# Altium PCB esp32.PcbDoc (part 1 of 3)
Units mil, origin at the board's own origin, x right, y up, seen from the top; angles counter-clockwise.
Board outline 2755 x 1098 mil, 4 copper layers (L1, L2, L3, L4), stack 61.745 mil thick; 63 components, 73 nets, 303 pads, 170 vias.
Unrouted connection lines stored in the file: 4.
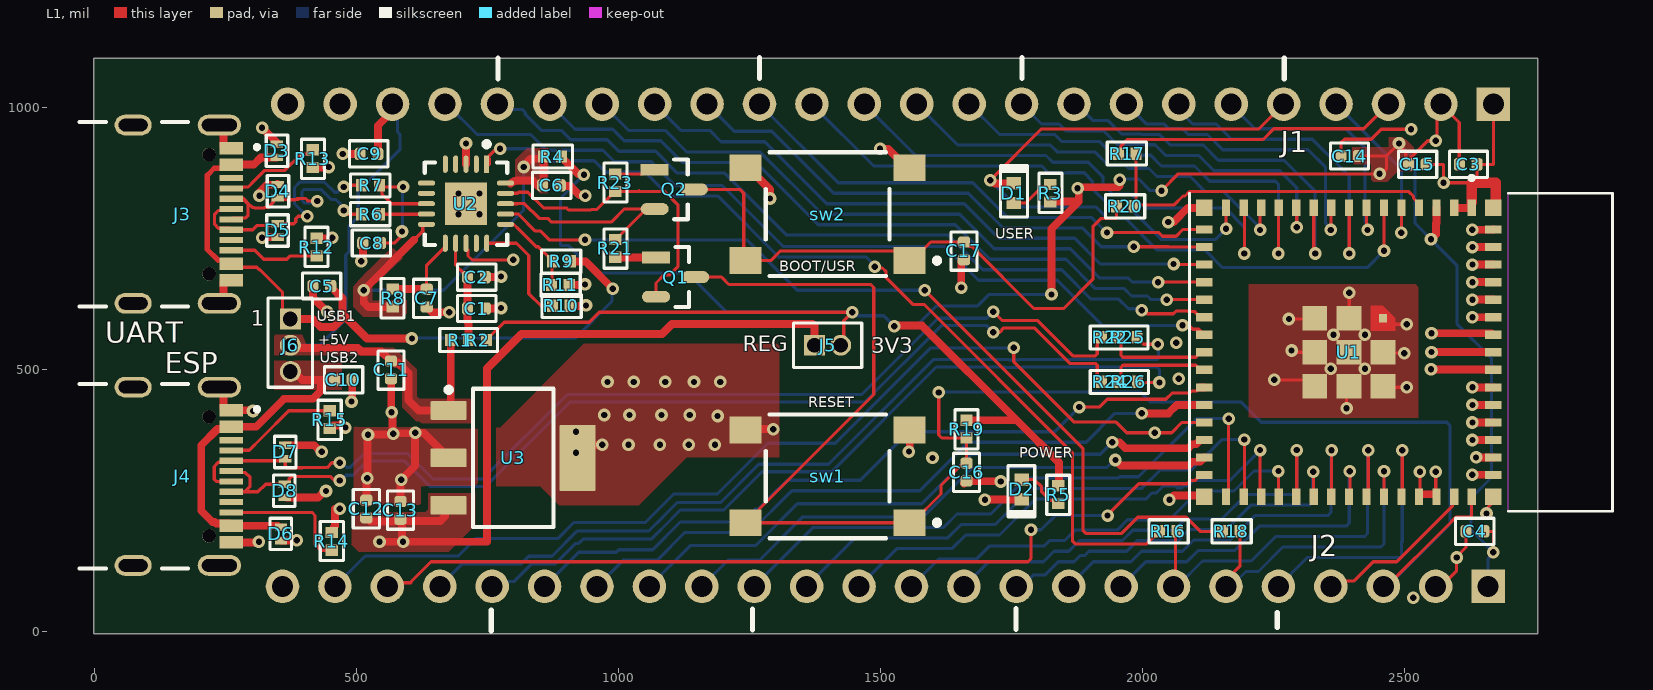
[diagram p0: L1 view]
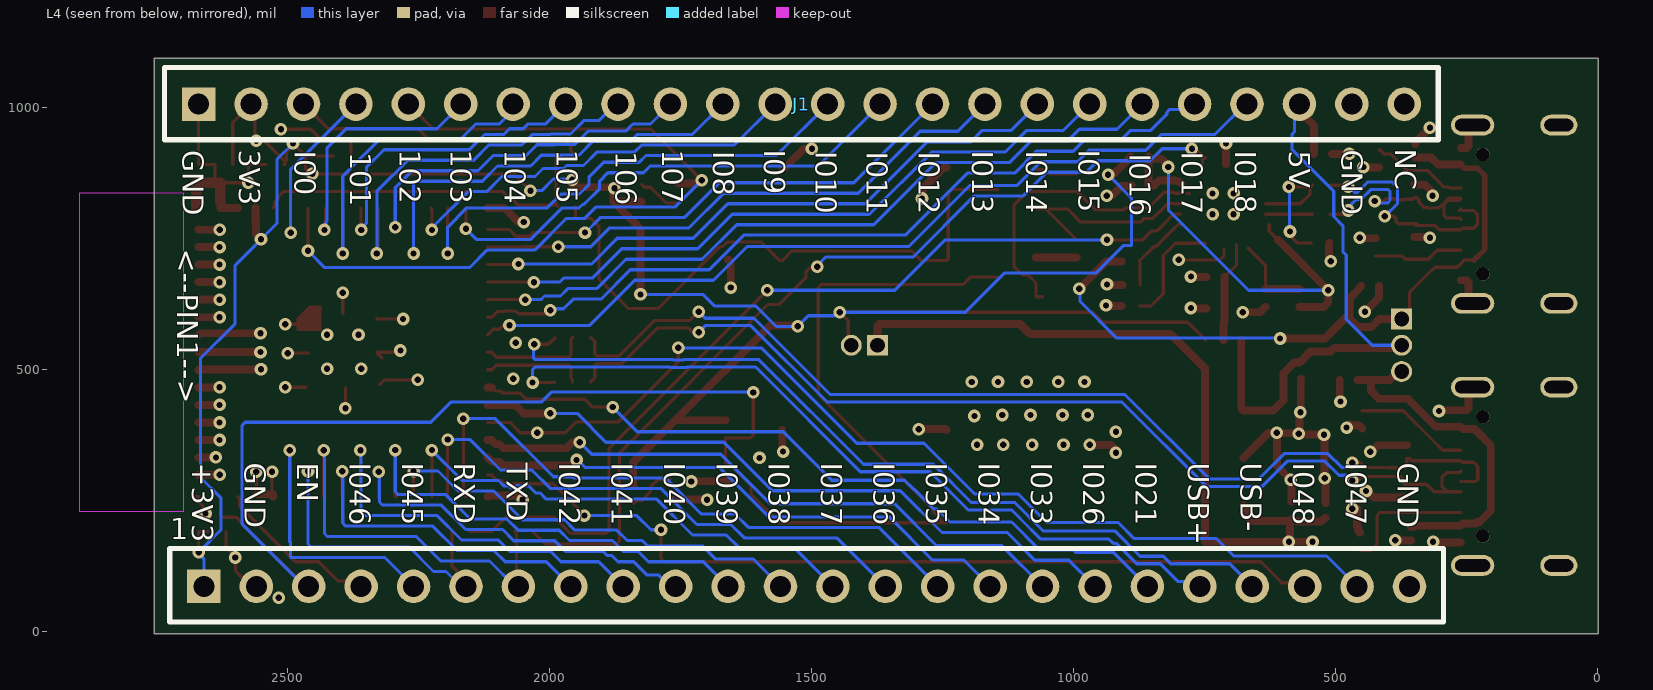
[diagram p1: L4 view, seen from below]
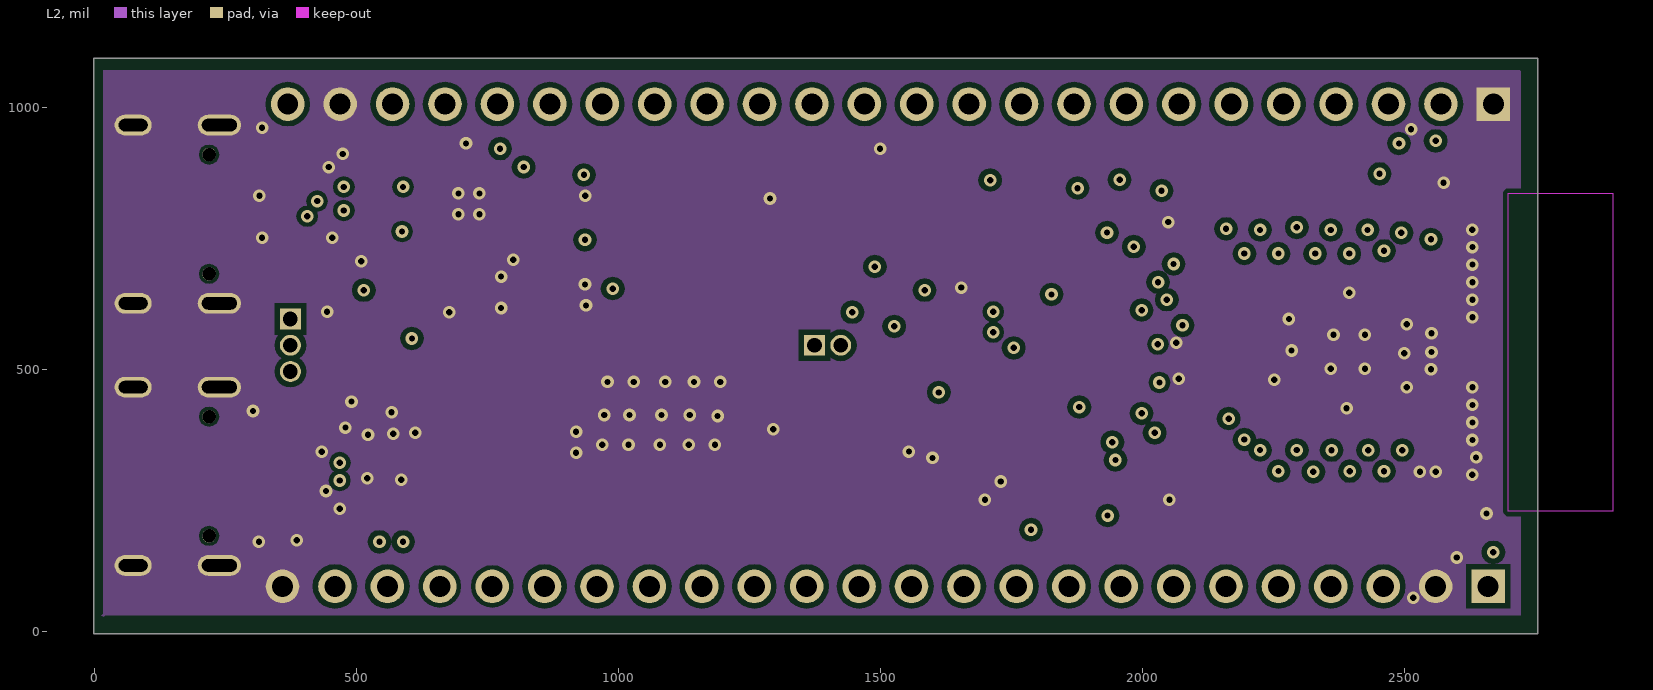
[diagram p2: L2]
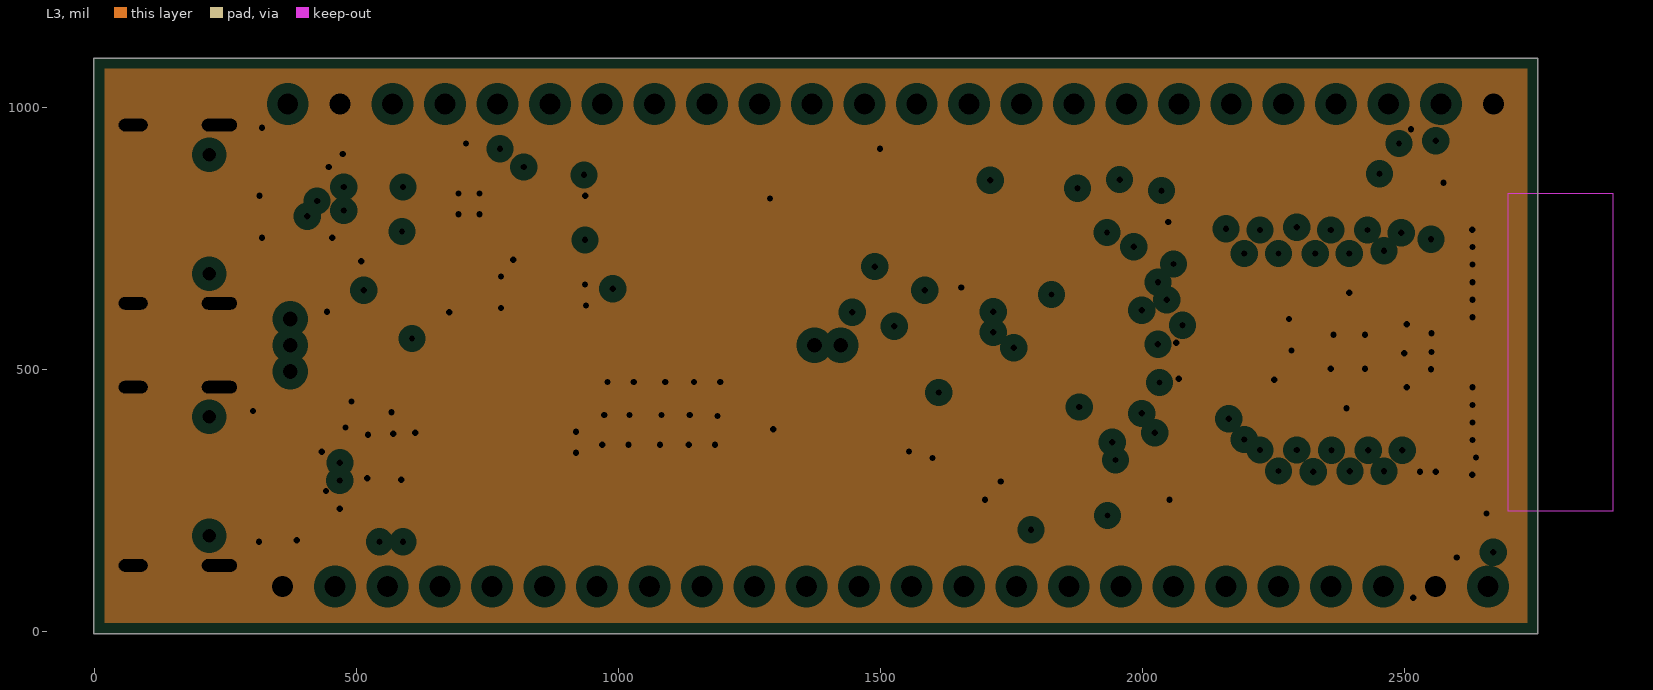
[diagram p3: L3, clearances drawn from the general rule]
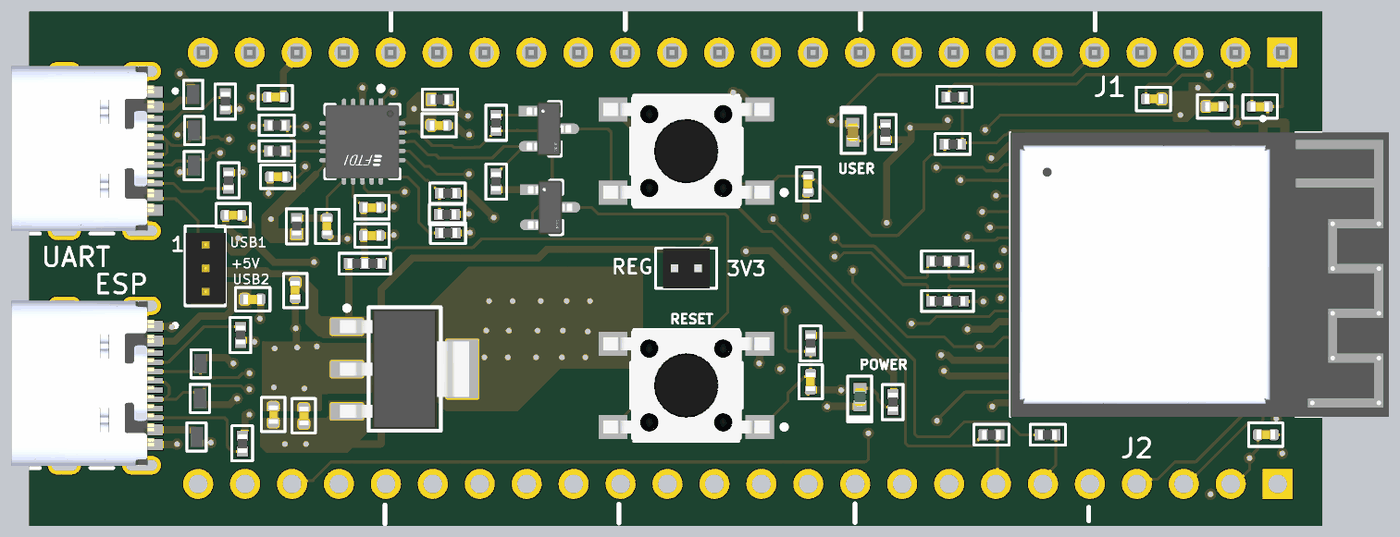
[diagram p5: 3D render of the assembled board from above, using the file's embedded part models]

## Layer stack, top to bottom
Top Solder: solder mask 0.4, Solder Resist, Dk 3.5
L1: signal copper 1.4
Dielectric 2: prepreg 3.9134, PP-006, Dk 4.1
L2: signal copper 0.5984
Dielectric 1: dielectric 49.9213, FR-4, Dk 4.8
L3: plane copper 0.5984, net GND
Dielectric 3: prepreg 3.9134, PP-006, Dk 4.1
L4: signal copper 1.4
Bottom Solder: solder mask 0.4, Solder Resist, Dk 3.5

## Board outline
-1,-4 2754,-4 2754,1094 -1,1094

## Design rules (kind name [scope] priority, off if disabled: settings)
Clearance SMALLER [WithinRoom('FTDI') or WithinRoom('USBC_2') OR WithinRoom('USBC_1')] p1: gap=6 ignorepadtopadclearanceinfootprint=TRUE
Clearance "DIFF90 Clerance" [InDifferentialPairClass('DIFF90')] p2: gap=8 ignorepadtopadclearanceinfootprint=TRUE
Clearance [All] p3: gap=10 ignorepadtopadclearanceinfootprint=TRUE except(6: SMDPad-SMDPad)
ComponentClearance R22R25 [InComponent('R22') vs InComponent('R25')] p1: gap=0 collisioncheckmode=3 verticalgap=0 showdistances=FALSE
ComponentClearance R1R2 [InComponent('R1') vs InComponent('R2')] p2: gap=0 collisioncheckmode=3 verticalgap=0 showdistances=FALSE
ComponentClearance R24R26 [InComponent('R24') vs InComponent('R26')] p3: gap=0 collisioncheckmode=3 verticalgap=0 showdistances=FALSE
ComponentClearance [All] p4: gap=10 collisioncheckmode=3 verticalgap=10 showdistances=FALSE
DiffPairsRouting [InDifferentialPairClass('DIFF90')] p1: maxlimit=10 minlimit=8 mostfreqgap=10 toplayer_maxgap=8.1 toplayer_prefgap=8 toplayer_minwidth=6 toplayer_maxwidth=6.23 toplayer_prefwidth=6.03 midlayer1_mingap=10 midlayer1_minwidth=6 midlayer1_maxwidth=15 midlayer1_prefwidth=15 bottomlayer_maxgap=8.1 bottomlayer_prefgap=8 bottomlayer_minwidth=6 bottomlayer_maxwidth=6.23 bottomlayer_prefwidth=6.03 maxuncoupledlength=2000
MinimumSolderMaskSliver [All] p1: minsoldermaskwidth=2
PlaneClearance [All] p1: clearance=20
PlaneConnect [All] p1: pad.planeconnectstyle=Relief pad.reliefexpansion=20 pad.reliefentries=4 pad.reliefconductorwidth=20 pad.reliefairgap=10 via.planeconnectstyle=Direct via.reliefexpansion=20 via.reliefentries=4 via.reliefconductorwidth=10 via.reliefairgap=10
PolygonConnect [All] p1: connectstyle=Direct reliefconductorwidth=10 reliefentries=4 polygonreliefangle="90 Angle" airgapwidth=10
RoomDefinition USBC_1 [False] p1: confinementstyle=ConfineIn formatcopy=TRUE lockcomponents=FALSE outline 194,941 304,941 304,646 194,646
RoomDefinition USBC_2 [False] p2: confinementstyle=ConfineIn formatcopy=TRUE lockcomponents=FALSE outline 194,446 319,446 319,151 194,151
RoomDefinition FTDI [False] p3: confinementstyle=ConfineIn formatcopy=TRUE lockcomponents=FALSE outline 609.63,910.66 809.63,910.66 809.63,715.66 609.63,715.66
RoomDefinition FTDI_1 [False] p4: confinementstyle=ConfineIn formatcopy=TRUE lockcomponents=FALSE outline 709,816
RoutingVias [All] p1: holewidth=12 width=24 viastyle="Through Hole" minholewidth=12 minwidth=24 maxholewidth=12 maxwidth=24
SilkToSilkClearance [All] p1: silktosilkclearance=1
SilkToSolderMaskClearance [IsPad] p1: minsilkscreentomaskgap=0.1 clearancetoexposedcopper=TRUE
SolderMaskExpansion [All] p1: expansion=2 istentingtop=FALSE
UnpouredPolygon [All] p1: allowshelved=TRUE
Width [All] p1: maxlimit=20 minlimit=6 preferedwidth=10
22 further rules are at their usual default settings.

## Classes and differential pairs
differential pair class DIFF90: CON1_USB CON2_USB CON_ESP_USB ESP_USB FTDI_USB
differential pair FTDI_USB: +FTDI_USB_P -FTDI_USB_N
differential pair ESP_USB: +ESP_USB_P -ESP_USB_N
differential pair CON_ESP_USB: +CON_ESP_USB_P -CON_ESP_USB_N
differential pair CON2_USB: +CON2_USB_P -CON2_USB_N
differential pair CON1_USB: +CON1_USB_P -CON1_USB_N

## Components (designator, comment, footprint, x,y, rotation, side; value= is the part's Value field where it differs from the comment)
C1 "4u7, 16V" CAPC1005X55N 729,616 r180 top
C2 "100nF, 50V" CAPC1005X55N 729,676 r180 top
C3 "100nF, 50V" CAPC1005X55N 2621.07,891 r180 top
C4 "100nF, 50V" CAPC1005X55N 2634,191 r0 top
C5 "100nF, 50V" CAPC1005X55N 434.07,659 r0 top
C6 "100nF, 50V" CAPC1005X55N 872.07,851 r180 top
C7 "100nF, 50V" CAPC1005X55N 634,636 r90 top
C8 "100nF, 50V" CAPC1005X55N 529,741 r0 top
C9 "100nF, 50V" CAPC1005X55N 524,911 r0 top
C10 "100nF, 50V" CAPC1005X55N 475,480 r180 top
C11 "4u7, 16V" CAPC1005X55N 566,499 r90 top
C12 "10uf , 10v" CAPC1005X55N 519,233.64 r270 top
C13 "10uf , 10v" CAPC1005X55N 584,231 r270 top
C14 "10uf , 10v" CAPC1005X55N 2395,907 r0 top
C15 "100nF, 50V" CAPC1005X55N 2524,891 r180 top
C16 "1uF, 35V" CAPC1005X55N 1664,304.07 r90 top
C17 "100nF, 50V" CAPC1005X55N 1659,726 r90 top
D1 "RED" "Led Red" 1754,836 r270 top
D2 "GREEN" "Led green" 1769,271 r90 top
D3 "AQ3045-01ETG" SOD882 348,917 r270 top
D4 "AQ3045-01ETG" SOD882 350,840 r270 top
D5 "AQ3045-01ETG" SOD882 350,765 r90 top
D6 "AQ3045-01ETG" SOD882 356,186 r90 top
D7 "AQ3045-01ETG" SOD882 364,342.39 r270 top
D8 "AQ3045-01ETG" SOD882 363,268.2 r90 top
J1 "0022284245" HDR_1X24_2.5MM 1519,1006 r90 bottom locked
J3 "2171790001" GCT_USB4105-GF-A 74,796 r270 top locked
J4 "2171790001" GCT_USB4105-GF-A 74,296 r270 top locked
J5 "FTS-102-01-F-S" HDR_1X2_1.27 1374,546 r90 top
J6 "FTS-103-01-F-S" HDR_1X3_1.27 374,596 r0 top locked
Q1 "SS8050-G" FP-SS8050-G-IPC_B 1109,676 r0 top
Q2 "SS8050-G" FP-SS8050-G-IPC_B 1106.42,843.4 r0 top
R1 "0R" RESC1005X37N 696.99,556 r0 top
R2 "0R" RESC1005X37N 731.01,556 r180 top
R3 "1KR" RESC1005X37N 1824,836 r270 top
R4 "0R" RESC1005X37N 874,906 r180 top
R5 "1KR" RESC1005X37N 1839,261 r90 top
R6 "27R" RESC1005X37N 526.99,796 r0 top
R7 "27R" RESC1005X37N 526.99,851 r0 top
R8 "0R" RESC1005X37N 569,636 r90 top
R9 "4K7" RESC1005X37N 891.01,706 r0 top
R10 "10 k" RESC1005X37N 891.01,621 r180 top
R11 "10 k" RESC1005X37N 889,661 r180 top
R12 "5K1" RESC1005X37N 424,733.01 r270 top
R13 "5K1" RESC1005X37N 417,902 r90 top
R14 "5K1" RESC1005X37N 453,172.01 r270 top
R15 "5K1" RESC1005X37N 449,404 r90 top
R16 "0R" RESC1005X37N 2049,191 r180 top
R17 "27R" RESC1005X37N 1970.53,911.63 r0 top
R18 "0R" RESC1005X37N 2169,191 r180 top
R19 "10 k" RESC1005X37N 1664,386 r90 top
R20 "27R" RESC1005X37N 1966.99,811 r0 top
R21 "10 k" RESC1005X37N 994,731 r90 top
R22 "0R" RESC1005X37N 1937.98,561 r0 top
R23 "10 k" RESC1005X37N 994,856 r270 top
R24 "0R" RESC1005X37N 1938.01,476 r0 top
R25 "0R" RESC1005X37N 1971.99,561 r180 top
R26 "0R" RESC1005X37N 1972.99,476 r180 top
sw1 "PTS645SH50SMTR92 LFS" FP-PTS645SH50SMTR92LFS-MFG 1399,296 r180 top locked
sw2 "PTS645SH50SMTR92 LFS" FP-PTS645SH50SMTR92LFS-MFG 1399,796 r180 top locked
U1 "ESP32-S3-MINI" XCVR_ESP32-S3-MINI-1-N8 2393.41,532.54 r270 top locked
U2 "FT231XQ-R" FP-QFN-20-IPC_B 709,816 r270 top
U3 "TL1963A-33DCYR" DCY0004A_N 799,331 r0 top locked

## Footprints (in the part's own frame and the unit in brackets; to place one, negate y for a bottom-side part, rotate by r counter-clockwise, add the part's x,y. Pads: shape width x height; smd on the part's side, far side on the other; paste and mask are expansions set on the pad)
CAPC1005X55N [mm]
  rrect53% 0.54x0.6 smd: 1(-0.43,0) 2(0.43,0)
  silkscreen extent -0.94,-0.64 0.91,0.64, body extent -0.5,-0.24 0.5,0.26, height 0.55
DCY0004A_N [mm] "SOT223, 4-Leads, Body 6.7x3.7mm, Pitch 2.3mm, IPC Medium Density"
  rrect11% 1.75x0.9 smd: 1(-3.125,2.3) 2(-3.125,0) 3(-3.125,-2.3)
  rrect6% 1.75x3.2 smd: 4(3.125,0)
  silkscreen extent -3.25,-3.35 1.95,3.42, body extent -3.5,-3.25 3.5,3.25, height 1.62
FP-PTS645SH50SMTR92LFS-MFG [mm]
  rect 1.55x1.3 smd paste+0 mask+0: 1(-3.975,2.25) 2(3.975,2.25) 3(-3.975,-2.25) 4(3.975,-2.25)
  silkscreen extent -5.43,-3 3,3, body extent -4.5,-3 4.5,3, height 4.3
FP-QFN-20-IPC_B [mm]
  rect 0.84x0.242 smd paste+0 mask+0: 1(-1.916,1)
  rrect100% 0.84x0.242 smd paste+0 mask+0: 2(-1.916,0.5) 3(-1.916,0) 4(-1.916,-0.5) 5(-1.916,-1) 11(1.916,-1) 12(1.916,-0.5) 13(1.916,0) 14(1.916,0.5) 15(1.916,1)
  rrect100% 0.242x0.84 smd paste+0 mask+0: 6(-1,-1.916) 7(-0.5,-1.916) 8(0,-1.916) 9(0.5,-1.916) 10(1,-1.916) 16(1,1.916) 17(0.5,1.916) 18(0,1.916) 20(-1,1.916)
  rrect100% 0.242x0.84 smd paste+0 mask+0.051: 19(-0.5,1.916)
  rect 2.05x2.05 smd paste-1000 mask+0: 21(0,0)
  silkscreen extent -3.01,-2 2,2, body extent -2.59,-2.59 2.59,2.59, height 0.25
FP-SS8050-G-IPC_B [mm]
  rect 1.357x0.572 smd paste+0 mask+0: 1(-0.951,0.95)
  rrect100% 1.357x0.572 smd paste+0 mask+0: 2(-0.951,-0.95) 3(0.951,0)
  silkscreen extent 0,-1.45 0.65,1.45, body extent -1.88,-1.7 1.88,1.7, height 0.25
GCT_USB4105-GF-A [mm]
  rect 0.6x1.15 smd mask+0.05: A1B12(-3.2,4.755) A4B9(-2.4,4.755) B1A12(3.2,4.755) B4A9(2.4,4.755)
  rect 0.3x1.15 smd mask+0.05: A5(-1.25,4.755) A6(-0.25,4.755) A7(0.25,4.755) A8(1.25,4.755) B5(1.75,4.755) B6(0.75,4.755) B7(-0.75,4.755) B8(-1.75,4.755)
  oval 1x2.1 hole 0.6 slot 1.7 at 90 deg: S1(-4.32,4.18) S2(4.32,4.18)
  oval 1x1.8 hole 0.6 slot 1.4 at 90 deg: S3(-4.32,0) S4(4.32,0)
  round 0.65 hole 0.65 unplated: ""(-2.89,3.68) ""(2.89,3.68)
  silkscreen extent -4.47,-2.6 4.47,6.1, body extent -4.6,-2.86 4.34,4.85, height 3.31
HDR_1X2_1.27 [mil]
  rect 40x40 hole 28: 1(0,0)
  round 40 hole 28: 2(0,-50)
  silkscreen extent -42,-90 43,40, body extent -42,-75 43,25, height 126
HDR_1X3_1.27 [mil]
  rect 40x40 hole 28: 1(0,0)
  round 40 hole 28: 2(0,-50) 3(0,-100)
  silkscreen extent -42,-130 42,40, body extent -42,-125 43,25, height 154
HDR_1X24_2.5MM [mil]
  rect 64x64 hole 40: 1(0,1150)
  round 64 hole 40: 2(0,1050) 3(0,950) 4(0,850) 5(0,750) 6(0,650) 7(0,550) 8(0,450) 9(0,350) 10(0,250) 11(0,150) 12(0,50) 13(0,-50) 14(0,-150) 15(0,-250) 16(0,-350) 17(0,-450) 18(0,-550) 19(0,-650) 20(0,-750) 21(0,-850) 22(0,-950) 23(0,-1050) 24(0,-1150)
  silkscreen extent -68,-1215 70,1215, body extent -49,-1200 49,1200, height 368
"Led green" [mm]
  rect 0.6x0.7 smd: 1(-0.475,0) 2(0.475,0)
  silkscreen extent -1.37,-0.69 1.14,0.74, body extent -0.5,-0.3 0.5,0.3, height 0.21
"Led Red" [mm]
  rect 0.6x0.7 smd: 1(-0.475,0) 2(0.475,0)
  silkscreen extent -1.37,-0.69 1.14,0.74, body extent -0.5,-0.3 0.5,0.3, height 0.2
RESC1005X37N [mm]
  rect 0.54x0.6 smd: 1(-0.432,0) 2(0.432,0)
  silkscreen extent -0.97,-0.56 0.94,0.56, body extent -0.5,-0.25 0.5,0.25, height 0.37
SOD882 [mm]
  rect 0.35x0.6 smd: 1(-0.325,0) 2(0.325,0)
  silkscreen extent -0.76,-0.51 0.76,0.53, body extent -0.53,-0.34 0.53,0.34, height 0.43
XCVR_ESP32-S3-MINI-1-N8 [mm]
  rect 0.8x0.4 smd: 1(-7,5.95) 2(-7,5.1) 3(-7,4.25) 4(-7,3.4) 5(-7,2.55) 6(-7,1.7) 7(-7,0.85) 8(-7,0) 9(-7,-0.85) 10(-7,-1.7) 11(-7,-2.55) 12(-7,-3.4) 13(-7,-4.25) 14(-7,-5.1) 15(-7,-5.95) 31(7,-5.95) 32(7,-5.1) 33(7,-4.25) 34(7,-3.4) 35(7,-2.55) 36(7,-1.7) 37(7,-0.85) 38(7,0) 39(7,0.85) 40(7,1.7) 41(7,2.55) 42(7,3.4) 43(7,4.25) 44(7,5.1) 45(7,5.95)
  rect 0.4x0.8 smd: 16(-5.95,-7) 17(-5.1,-7) 18(-4.25,-7) 19(-3.4,-7) 20(-2.55,-7) 21(-1.7,-7) 22(-0.85,-7) 23(0,-7) 24(0.85,-7) 25(1.7,-7) 26(2.55,-7) 27(3.4,-7) 28(4.25,-7) 29(5.1,-7) 30(5.95,-7) 46(5.95,7) 47(5.1,7) 48(4.25,7) 49(3.4,7) 50(2.55,7) 51(1.7,7) 52(0.85,7) 53(0,7) 54(-0.85,7) 55(-1.7,7) 56(-2.55,7) 57(-3.4,7) 58(-4.25,7) 59(-5.1,7) 60(-5.95,7)
  rect 1.2x1.2 smd: 61(0,0) 67(0,1.65) 68(1.65,1.65) 69(-1.65,0) 70(1.65,0) 71(-1.65,-1.65) 72(0,-1.65) 73(1.65,-1.65)
  rect 0.8x0.8 smd: 62(-7,7) 63(-7,-7) 64(7,-7) 65(7,7)
  rect 0.4x0.4 smd paste-1 mask+0: 66(-1.65,1.65)
  L1 region: -1.05,1.05 -2.25,1.05 -2.25,1.65 -1.65,2.25 -1.05,2.25
  Keep-Out Layer region: 7.7,7.725 -7.7,7.725 -7.7,12.775 7.7,12.775
  Keep-Out Layer region: 7.7,7.725 -7.7,7.725 -7.7,12.775 7.7,12.775
  silkscreen extent -8.55,-7.73 7.7,12.78, body extent -7.7,-7.73 7.7,12.78, height 2.55

## Part data
C1 C11: library part CL05A475MO5NUNC, "4.7 µF ±20% 16V Ceramic Capacitor X5R 0402 (1005 Metric)", Capacitance=4.7uF, Case Code (Imperial)=0402, Case Code (Metric)=1005, LCSC PART NUMBER=C318563, Manufacturer=Samsung, Max Operating Temperature=85°C, Min Operating Temperature=-55°C, Tolerance=20%, Voltage Rating=16V, Case/Package=0402, Category="Ceramic Capacitors", ComponentLink1Description=http://www.farnell.com/datasheets/2710653.pdf?src-supplier=Farnell, ComponentLink1URL=http://www.farnell.com/datasheets/2710653.pdf?src-supplier=Farnell, ComponentLink2Description=http://www.samsungsem.com/kr/support/product-search/mlcc/CL05A475MO5NUNC.jsp?src-supplier=Digikey, ComponentLink2URL=http://www.samsungsem.com/kr/support/product-search/mlcc/CL05A475MO5NUNC.jsp?src-supplier=Digikey, ComponentLink3Description=http://www.farnell.com/datasheets/2710653.pdf?src-supplier=Element14, ComponentLink3URL=http://www.farnell.com/datasheets/2710653.pdf?src-supplier=Element14, ComponentLink4Description=https://datasheet.octopart.com/CL05A475MO5NUNC-Samsung-Electro-Mechanics-datasheet-123102911.pdf?src-supplier=Future+Electronics, ComponentLink4URL=https://datasheet.octopart.com/CL05A475MO5NUNC-Samsung-Electro-Mechanics-datasheet-123102911.pdf?src-supplier=Future+Electronics, ComponentLink5Description=http://www.farnell.com/datasheets/2710653.pdf?src-supplier=Newark, ComponentLink5URL=http://www.farnell.com/datasheets/2710653.pdf?src-supplier=Newark, Height=550um, Length=0.039inch, Manufacturer Part Number=CL05A475MO5NUNC, Material=4241ConductorMaterial, Mount="Surface Mount", Packaging="Cut Tape", Pricing 1="1=0.45, 10=0.268, 50=0.1948, 100=0.1721, 500=0.1333, 1000=0.12121, 2500=0.10837, 5000=0.10058 (USD)", RoHS=Yes, RoHS Compliant=Yes, Series=CL, Stock 1=96632, Supplier 1=Digikey, Thickness=0.022inch, Voltage Rating (DC)=16V, Width=0.02inch
C2 C3 C4 C5 C6 C7 C8 C9 C10 C15 C17: library part CL05B104KB54PNC, "CAP CER 0.1UF 50V X7R 0402", Capacitance=100nF, Case/Package=343Case, LCSC PART NUMBER=C307331, Manufacturer=Samsung, Max Operating Temperature=125°C, Min Operating Temperature=-55°C, Supplier Part Number 1=1276-CL05B104KB54PNCCT-ND, Tolerance=10%, Voltage Rating=50V, Category="Ceramic Capacitors", ComponentLink1Description=https://datasheet.octopart.com/CL05B104KB54PNC-Samsung-datasheet-8326407.pdf?src-supplier=TME, ComponentLink1URL=https://datasheet.octopart.com/CL05B104KB54PNC-Samsung-datasheet-8326407.pdf?src-supplier=TME, Height=550um, Material=4241ConductorMaterial, RoHS=Yes, RoHS Compliant=Yes, Stock 1=471427, Supplier 1=Digikey
C12 C13 C14: library part CL05A106MP8NUB8, "10 µF ±20% 10V Ceramic Capacitor X5R 0402 (1005 Metric)", Capacitance=10uF, Case Code (Imperial)=0402, Case Code (Metric)=1005, LCSC PART NUMBER=C307415, Manufacturer=Samsung, Max Operating Temperature=85°C, Min Operating Temperature=-55°C, Tolerance=20%, Voltage Rating=10V, Case/Package=0402, Category="Ceramic Capacitors", ComponentLink1Description=http://www.samsungsem.com/kr/support/product-search/mlcc/CL05A106MP8NUB8.jsp?src-supplier=Digikey, ComponentLink1URL=http://www.samsungsem.com/kr/support/product-search/mlcc/CL05A106MP8NUB8.jsp?src-supplier=Digikey, ComponentLink2Description=https://datasheet.octopart.com/CL05A106MP8NUB8-Samsung-Electro-Mechanics-datasheet-136460857.pdf?src-supplier=Future+Electronics, ComponentLink2URL=https://datasheet.octopart.com/CL05A106MP8NUB8-Samsung-Electro-Mechanics-datasheet-136460857.pdf?src-supplier=Future+Electronics, Height=550um, Length=0.039inch, Material=4241ConductorMaterial, Mount="Surface Mount", Packaging="Cut Tape", RoHS=Yes, RoHS Compliant=Yes, Series=CL, Stock 1=798892, Supplier 1=Digikey, Thickness=0.035inch, Width=0.02inch
C16: library part CL05A105KL5NRNC, "CAP CER 1UF 35V X5R 0402", Capacitance=1uF, Case Code (Imperial)=0402, Case Code (Metric)=1005, LCSC PART NUMBER=C307413, Manufacturer=Samsung, Max Operating Temperature=85°C, Min Operating Temperature=-55°C, Tolerance=10%, Voltage Rating=35V, Case/Package=0402, Category="Ceramic Capacitors", ComponentLink1Description=http://www.samsungsem.com/kr/support/product-search/mlcc/CL05A105KL5NRNC.jsp?src-supplier=Digikey, ComponentLink1URL=http://www.samsungsem.com/kr/support/product-search/mlcc/CL05A105KL5NRNC.jsp?src-supplier=Digikey, Height=550um, Length=0.039inch, Material=4241ConductorMaterial, Mount="Surface Mount", Packaging="Cut Tape", RoHS=Yes, RoHS Compliant=Yes, Series=CL, Stock 1=302973, Supplier 1=Digikey, Thickness=0.022inch, Width=0.02inch
D1: library part VLMS1500-GS08, "LED RED 0402 SMD", Case Code (Imperial)=0402, Case Code (Metric)=1005, Color=Red, Forward Current=30mA, Forward Voltage=2V, LCSC PART NUMBER=C511370, Manufacturer=Vishay, Max Operating Temperature=85°C, Min Operating Temperature=-30°C, Package Quantity=9000, Power Rating=75mW, Test Current=20mA, Case/Package=0402, Category=LEDs, ComponentLink1Description=http://components.arrow.com/part/dataview/56357384S461524N5680?src-supplier=Arrow+Electronics, ComponentLink1URL=http://components.arrow.com/part/dataview/56357384S461524N5680?src-supplier=Arrow+Electronics, ComponentLink2Description=http://www.mouser.com/ds/2/427/vlmo1500-244705.pdf?src-supplier=Mouser, ComponentLink2URL=http://www.mouser.com/ds/2/427/vlmo1500-244705.pdf?src-supplier=Mouser, ComponentLink3Description=http://www.farnell.com/datasheets/1809983.pdf?src-supplier=Farnell, ComponentLink3URL=http://www.farnell.com/datasheets/1809983.pdf?src-supplier=Farnell, ComponentLink4Description=http://www.alliedelec.com/m/d/cfc385e1097fc985ee9a50a3551ac188.pdf?src-supplier=Allied+Electronics, ComponentLink4URL=http://www.alliedelec.com/m/d/cfc385e1097fc985ee9a50a3551ac188.pdf?src-supplier=Allied+Electronics, ComponentLink5Description=https://datasheet.octopart.com/VLMS1500-GS08-Vishay-datasheet-62332426.pdf?src-supplier=Newark, ComponentLink5URL=https://datasheet.octopart.com/VLMS1500-GS08-Vishay-datasheet-62332426.pdf?src-supplier=Newark, ComponentLink6Description=http://www.vishay.com/docs/82554/vlmo1500.pdf?src-supplier=Avnet, ComponentLink6URL=http://www.vishay.com/docs/82554/vlmo1500.pdf?src-supplier=Avnet, ComponentLink7Description=https://datasheet.octopart.com/VLMS1500-GS08-Vishay-datasheet-21227148.pdf?src-supplier=Future+Electronics, ComponentLink7URL=https://datasheet.octopart.com/VLMS1500-GS08-Vishay-datasheet-21227148.pdf?src-supplier=Future+Electronics, ComponentLink8Description=http://www.farnell.com/datasheets/2050839.pdf?src-supplier=Newark, ComponentLink8URL=http://www.farnell.com/datasheets/2050839.pdf?src-supplier=Newark, ComponentLink9Description=http://www.farnell.com/datasheets/1809983.pdf?src-supplier=Element14, ComponentLink9URL=http://www.farnell.com/datasheets/1809983.pdf?src-supplier=Element14, ComponentLink10Description=https://datasheet.octopart.com/VLMS1500-GS08-Vishay-datasheet-33014519.pdf?src-supplier=Element14, ComponentLink10URL=https://datasheet.octopart.com/VLMS1500-GS08-Vishay-datasheet-33014519.pdf?src-supplier=Element14, ComponentLink11Description=http://www.farnell.com/datasheets/1809983.pdf?src-supplier=Newark, ComponentLink11URL=http://www.farnell.com/datasheets/1809983.pdf?src-supplier=Newark, ComponentLink12Description=http://datasheet.octopart.com/VLMS1500-GS08-Vishay-datasheet-21227148.pdf?src-supplier=Avnet, ComponentLink12URL=http://datasheet.octopart.com/VLMS1500-GS08-Vishay-datasheet-21227148.pdf?src-supplier=Avnet, ComponentLink13Description=http://datasheet.octopart.com/VLMS1500-GS08-Vishay-datasheet-21227148.pdf?src-supplier=LCSC, ComponentLink13URL=http://datasheet.octopart.com/VLMS1500-GS08-Vishay-datasheet-21227148.pdf?src-supplier=LCSC, ComponentLink14Description=http://datasheet.octopart.com/VLMS1500-GS08-Vishay-datasheet-21227148.pdf?src-supplier=Quest, ComponentLink14URL=http://datasheet.octopart.com/VLMS1500-GS08-Vishay-datasheet-21227148.pdf?src-supplier=Quest, ComponentLink15Description=http://datasheet.octopart.com/VLMS1500-GS08-Vishay-datasheet-21227148.pdf?src-supplier=NAC+Semi, ComponentLink15URL=http://datasheet.octopart.com/VLMS1500-GS08-Vishay-datasheet-21227148.pdf?src-supplier=NAC+Semi, Dominant Wavelength=631nm, Height=0.55mm, Illumination Color=Red, Lead Free="Lead Free", Length=1mm, Lens Size=0.5mm, Lens Style=Flat,Rectangular,Square, Luminous Intensity=54mcd, Manufacturer Part Number=VLMS1500-GS08, Mount="Surface Mount", Number of LEDs=1, Number of Pins=2, Packaging="Tape and Reel", Pricing 1="3000=0.07676, 6000=0.06908, 15000=0.06141, 30000=0.05757, 75000=0.05181, 150000=0.04989 (USD)", Radiation Hardening=No, Reach SVHC Compliant=Unknown, RoHS=Yes, RoHS Compliant=Yes, Series=CHipLED, Stock 1=45000, Supplier 1=Digikey, Viewing Angle=130°, Wavelength=631nm, Width=0.5mm
D2: library part VLMG1500-GS08, "LED YLW-GRN 0402 SMD", Case Code (Imperial)=0402, Case Code (Metric)=1005, Color=Green,Yellow, Forward Current=30mA, Forward Voltage=2V, Illumination Color=Green, LCSC PART NUMBER=C511404, Lens Color=Clear, Manufacturer=Vishay, Max Operating Temperature=85°C, Min Operating Temperature=-30°C, Package Quantity=1, Power Dissipation=75mW, Reverse Voltage=5V, Test Current=20mA, Case/Package=0402, Category=LEDs, ComponentLink1Description=https://datasheet.ciiva.com/12071/vlmo1500-244705-12071911.pdf?src-supplier=Mouser, ComponentLink1URL=https://datasheet.ciiva.com/12071/vlmo1500-244705-12071911.pdf?src-supplier=Mouser, ComponentLink2Description=https://datasheet.ciiva.com/30005/vlmo1500-30005134.pdf?src-supplier=Avnet, ComponentLink2URL=https://datasheet.ciiva.com/30005/vlmo1500-30005134.pdf?src-supplier=Avnet, Depth=0.5mm, Dominant Wavelength=571nm, Height=0.35mm, Lead Free="Lead Free", Length=1mm, Lens Style=Rectangular, Luminous Intensity=35mcd, Manufacturer Part Number=VLMG1500-GS08, Mount="Surface Mount", Number of Elements=1, Number of LEDs=1, Number of Pins=2, Packaging="Tape and Reel", Power Rating=75mW, Pricing 1="3000=0.07676, 6000=0.06908, 15000=0.06141, 30000=0.05757, 75000=0.05181, 150000=0.04989 (USD)", Radiation Hardening=No, Reach SVHC Compliant=Unknown, RoHS=Yes, RoHS Compliant=Yes, Series=CHipLED, Stock 1=93000, Supplier 1=Digikey, Viewing Angle=130°, Wavelength=571nm, Width=0.5mm
D3 D4 D5 D6 D7 D8: "TVS DIODE 5.3VWM 12VC SOD882", LCSC PART NUMBER=C3710326, Leakage Current=100nA, Manufacturer=Littelfuse, Max Operating Temperature=150°C, Min Breakdown Voltage=6.8V, Min Operating Temperature=-55°C, Operating Supply Voltage=5.3V, Peak Pulse Current=3A, Peak Pulse Power=40W, Power Line Protection=No, Supplier Part Number 1=F9321DKR-ND, Category="TVS Diodes", ComponentLink1Description=https://www.littelfuse.com/~/media/electronics/datasheets/tvs_diode_arrays/littelfuse_tvs_diode_array_aq3045_datasheet.pdf.pdf?src-supplier=Digikey, ComponentLink1URL=https://www.littelfuse.com/~/media/electronics/datasheets/tvs_diode_arrays/littelfuse_tvs_diode_array_aq3045_datasheet.pdf.pdf?src-supplier=Digikey, ComponentLink2Description=http://www.littelfuse.com/~/media/electronics/datasheets/tvs_diode_arrays/littelfuse_tvs_diode_array_aq3045_datasheet.pdf.pdf?src-supplier=Digikey, ComponentLink2URL=http://www.littelfuse.com/~/media/electronics/datasheets/tvs_diode_arrays/littelfuse_tvs_diode_array_aq3045_datasheet.pdf.pdf?src-supplier=Digikey, Diode Type=ZENER, Manufacturer Part Number=AQ3045-01ETG, Mount="Surface Mount", Number of Bidirectional Channels=1, Number of Channels=1NUMBER, Packaging="Cut Tape", Pricing 1="1=0.5, 10=0.391, 100=0.2344, 500=0.217, 1000=0.14756, 2000=0.13585, 5000=0.1302 (USD)", Reverse Standoff Voltage=5.3V, RoHS=Yes, RoHS Compliant=Yes, Series="Automotive, AEC-Q101, AQ3045, SPA®", Stock 1=20579, Supplier 1=Digikey
J1: "CONN HEADER VERT 24POS 2.54MM", Color=Black, Current Rating=4A, Flammability Rating="UL94 V-0", LCSC PART NUMBER=C7145888, Manufacturer=Molex, Package Quantity=1, Voltage Rating=250V, Category=Uncategorized, ComponentLink1Description=https://datasheet.ciiva.com/6814/022284363-sd-6814049.pdf?src-supplier=Digikey, ComponentLink1URL=https://datasheet.ciiva.com/6814/022284363-sd-6814049.pdf?src-supplier=Digikey, ComponentLink2Description=https://datasheet.ciiva.com/5153/0022284245-pcb-headers-228340-5153875.pdf?src-supplier=Mouser, ComponentLink2URL=https://datasheet.ciiva.com/5153/0022284245-pcb-headers-228340-5153875.pdf?src-supplier=Mouser, ComponentLink3Description=https://datasheet.ciiva.com/10075/0022284245-pcb-headers-10075617.pdf?src-supplier=Avnet, ComponentLink3URL=https://datasheet.ciiva.com/10075/0022284245-pcb-headers-10075617.pdf?src-supplier=Avnet, ComponentLink4Description=https://datasheet.ciiva.com/1433/1597854-1433759.pdf?src-supplier=Element14, ComponentLink4URL=https://datasheet.ciiva.com/1433/1597854-1433759.pdf?src-supplier=Element14, Contact Finish - Mating=GOLD, Contact Material=Brass, Contact Mating Length=0.295inch, Contact Plating=Gold, Contact Shape=Square, Contact Type="Male Pin", Fastening Type=Pull, Gender=Male, Glow Wire Compliant=Non-compliant, Housing Color=Black, Housing Material=Thermoplastic, Insulation Color=Black, Insulation Material=Nylon, Lead Free="Lead Free", Manufacturer Part Number=0022284245, Mount="Through Hole", Number of Circuits=24, Number of Contacts=24, Number of Positions=24, Number of Rows=1, Orientation=Vertical, Packaging=Bulk, Pitch=2.54mm, Pricing 1="1=1.45, 10=1.091, 100=0.8495, 500=0.73094, 1000=0.68963, 5000=0.61174, 10000=0.58469 (USD)", RoHS=Yes, RoHS Compliant=Yes, Series=42375, Stock 1=2960, Supplier 1=Digikey, Termination=Solder
J3 J4: library part 217179-0001, "CONN RCP USB2.0 TYP C 24P SMD RA", Current Rating=1.25A, LCSC PART NUMBER=C3197684, Manufacturer=Molex, Max Operating Temperature=85°C, Min Operating Temperature=-40°C, Supplier Part Number 1=900-2171790001CT-ND, Voltage Rating=30V, Category="USB Connectors", Contact Material=153,157ConductorMaterial, Gender=4472Gender, Height=3.36mm, Manufacturer Part Number=217179-0001, Number of Contacts=16NUMBER, Pricing 1="1=0.9, 10=0.745, 100=0.6212 (USD)", RoHS=No, Stock 1=10099, Supplier 1=Digikey, USB Standard=6108USBStandard
J5: "Conn Unshrouded Header HDR 2 POS 1.27mm Solder ST r", Flammability Rating="UL94 V-0", Insulation Color=Black, LCSC PART NUMBER=C6045317, Manufacturer=Samtec, Max Operating Temperature=125°C, Min Operating Temperature=-55°C, Category=Connectors, ComponentLink1Description=http://www.samtec.com/documents/webfiles/pdf/FTS.pdf?src-supplier=Avnet, ComponentLink1URL=http://www.samtec.com/documents/webfiles/pdf/FTS.pdf?src-supplier=Avnet, Contact Finish - Mating=GOLD, Contact Material=Bronze, Contact Plating=Gold, Contact Shape=Square, Contact Type="Male Pin", Fastening Type=Pull, Gender=Male, Insulation Material=Polymer, Manufacturer Part Number=FTS-102-01-F-S, Mount="Through Hole", Number of Contacts=2, Number of Positions=2, Number of Rows=1, Packaging=Bulk, Pitch=1.27mm, Pricing 1="1=0.49, 50=0.4252, 100=0.3608, 500=0.2994, 1000=0.2625 (USD)", Radiation Hardening=No, RoHS=Yes, RoHS Compliant=Yes, Series=FTS, Stock 1=835, Supplier 1=Digikey, Termination=Solder
J6: "CONN HEADER VERT 3POS 1.27MM", LCSC PART NUMBER=C3333578, Manufacturer=Samtec, Supplier Part Number 1=612-FTS-103-01-F-S-ND, Category=Connectors, ComponentLink1Description=http://www.samtec.com/documents/webfiles/pdf/FTS.pdf?src-supplier=Avnet, ComponentLink1URL=http://www.samtec.com/documents/webfiles/pdf/FTS.pdf?src-supplier=Avnet, ComponentLink2Description=http://suddendocs.samtec.com/prints/fts-1xx-xx-xx-xx-xx-mkt.pdf?src-supplier=Digikey, ComponentLink2URL=http://suddendocs.samtec.com/prints/fts-1xx-xx-xx-xx-xx-mkt.pdf?src-supplier=Digikey, ComponentLink3Description=https://datasheet.octopart.com/FTS-103-01-F-S-Samtec-datasheet-116535195.pdf?src-supplier=Toby+Electronics, ComponentLink3URL=https://datasheet.octopart.com/FTS-103-01-F-S-Samtec-datasheet-116535195.pdf?src-supplier=Toby+Electronics, ComponentLink4Description=https://datasheet.octopart.com/FTS-103-01-F-S-Samtec-datasheet-151470456.pdf?src-supplier=Sager+Electronics, ComponentLink4URL=https://datasheet.octopart.com/FTS-103-01-F-S-Samtec-datasheet-151470456.pdf?src-supplier=Sager+Electronics, Manufacturer Part Number=FTS-103-01-F-S, Pricing 1="1=0.73, 50=0.6378, 100=0.5407, 500=0.4491, 1000=0.4 (USD)", RoHS=Yes, Stock 1=2947, Supplier 1=Digikey
Q1 Q2: "Bipolar (BJT) Transistor NPN 25 V 1.5 A 100MHz 300 mW Surface Mount SOT-23-3", Case/Package=TO-236-3, Collector Base Voltage (VCBO)=40V, Collector Emitter Breakdown Voltage=25V, Collector Emitter Saturation Voltage=500mV, Collector-emitter Voltage-Max=400mV, Emitter Base Voltage (VEBO)=5V, LCSC PART NUMBER=C164886, Manufacturer=Comchip, Max Collector Current=1.5A, Max Operating Temperature=150°C, Max Power Dissipation=300mW, Transition Frequency=100MHz, Category=Transistors, ComponentLink1Description="http://www.comchiptech.com/admin/files/product/SS8050-G RevA181526.pdf?src-supplier=Digikey", ComponentLink1URL="http://www.comchiptech.com/admin/files/product/SS8050-G RevA181526.pdf?src-supplier=Digikey", Height=1.15mm, hFE Min=200NUMBER, Manufacturer Part Number=SS8050-G, Max Breakdown Voltage=25V, Mount="Surface Mount", Number of Elements=1NUMBER, Packaging="Cut Tape", Power Dissipation=300mW, Pricing 1="3000=0.04911, 6000=0.04555, 9000=0.03777, 30000=0.03711, 75000=0.03333, 150000=0.02889 (USD)", RoHS=Yes, RoHS Compliant=Yes, Series=-, Stock 1=71980, Supplier 1=Digikey
R1 R2 R4 R8 R16 R18 R22 R24 R25 R26: library part RC0402JR-070RL, "RES 0 OHM JUMPER 1/16W 0402", Case Code (Imperial)=0402, Case Code (Metric)=1005, LCSC PART NUMBER=C60485, Manufacturer=Yageo, Max Operating Temperature=155°C, Max Power Dissipation=63mW, Min Operating Temperature=-55°C, Package Quantity=1, Power Rating=62.5mW, Resistance=0mR, Resistance Tolerance=5%, Resistor Type="Thick Film", Temperature Coefficient=200ppm/°C, Voltage Rating=50V, Case/Package=0402, Category="Chip SMD Resistors", Construction=Rectangular, Contact Plating=Tin,Matte, Depth=0.5mm, Features="Moisture Resistant", Height=0.016inch, Lead Free=5697LeadFree, Length=1mm, Manufacturer Part Number=RC0402JR-070RL, Military Standard=Not, Number of Terminations=2, Packaging="Tape and Reel", Pricing 1="1=0.1, 10=0.011, 25=0.0084, 50=0.0064, 100=0.0045, 250=0.00364, 500=0.0029, 1000=0.00214, 5000=0.00154 (USD)", Reach SVHC Compliant=Unknown, RoHS=Yes, RoHS Compliant=Yes, Series=RC, Size Code=0402, Stock 1=17184444, Supplier 1=Digikey, Technology="THICK FILM", Termination=SMD/SMT, Tolerance=5%, Width=0.02inch
R3 R5: library part RC0402FR-071KL, "RES 1K OHM 1% 1/16W 0402", Case Code (Imperial)=0402, Case Code (Metric)=1005, LCSC PART NUMBER=C106235, Manufacturer=Yageo, Max Operating Temperature=155°C, Max Power Dissipation=63mW, Min Operating Temperature=-55°C, Power Rating=62.5mW, Resistance=1kR, Resistance Tolerance=1%, Resistor Type="Thick Film", Temperature Coefficient=100ppm/°C, Voltage Rating=50V, Case/Package=0402, Category="Chip SMD Resistors", ComponentLink1Description=https://datasheet.ciiva.com/11819/0900766b80c66297-11819477.pdf?src-supplier=Rs, ComponentLink1URL=https://datasheet.ciiva.com/11819/0900766b80c66297-11819477.pdf?src-supplier=Rs, ComponentLink2Description=https://datasheet.ciiva.com/7983/1018594-7983502.pdf?src-supplier=Element14, ComponentLink2URL=https://datasheet.ciiva.com/7983/1018594-7983502.pdf?src-supplier=Element14, ComponentLink3Description=https://datasheet.ciiva.com/22747/1018594-22747513.pdf?src-supplier=Element14, ComponentLink3URL=https://datasheet.ciiva.com/22747/1018594-22747513.pdf?src-supplier=Element14, ComponentLink4Description=https://datasheet.ciiva.com/12666/pyu-rc0402-51-rohs-l-6-r-12666741.pdf?src-supplier=Mouser, ComponentLink4URL=https://datasheet.ciiva.com/12666/pyu-rc0402-51-rohs-l-6-r-12666741.pdf?src-supplier=Mouser, ComponentLink5Description=https://datasheet.ciiva.com/7849/1018594-7849869.pdf?src-supplier=Element14, ComponentLink5URL=https://datasheet.ciiva.com/7849/1018594-7849869.pdf?src-supplier=Element14, ComponentLink6Description=https://datasheet.ciiva.com/7849/1018594-7849871.pdf?src-supplier=Element14, ComponentLink6URL=https://datasheet.ciiva.com/7849/1018594-7849871.pdf?src-supplier=Element14, ComponentLink7Description=https://datasheet.ciiva.com/17063/pyu-rc0402-51-rohs-l-6-r-17063193.pdf?src-supplier=Future+Electronics, ComponentLink7URL=https://datasheet.ciiva.com/17063/pyu-rc0402-51-rohs-l-6-r-17063193.pdf?src-supplier=Future+Electronics, Construction=Rectangular, Depth=0.5mm, Features="Moisture Resistant", Height=0.32mm, Lead Free=5697LeadFree, Length=1mm, Manufacturer Part Number=RC0402FR-071KL, Military Standard=Not, Number of Pins=2, Number of Terminations=2, Packaging="Tape and Reel", Pricing 1="10000=0.00261, 20000=0.00231, 30000=0.00216, 50000=0.00199, 100000=0.00179 (USD)", Reach SVHC Compliant=No, RoHS=Yes, RoHS Compliant=Yes, Series=RC, Size Code=0402, Stock 1=7422740, Supplier 1=Digikey, Technology="THICK FILM", Termination=SMD/SMT, Tolerance=1%, Voltage Rating (AC)=50V, Voltage Rating (DC)=50V, Width=0.5mm
R6 R7 R17 R20: library part RC0402FR-0727RL, "RES 27 OHM 1% 1/16W 0402", Case Code (Imperial)=0402, Case Code (Metric)=1005, LCSC PART NUMBER=C138021, Manufacturer=Yageo, Max Operating Temperature=155°C, Max Power Dissipation=63mW, Min Operating Temperature=-55°C, Power Rating=62.5mW, Resistance Tolerance=1%, Resistor Type="Thick Film", Supplier Part Number 1=YAG3086CT-ND, Temperature Coefficient=100ppm/°C, Voltage Rating=50V, Case/Package=0402, Category="Chip SMD Resistors", ComponentLink1Description=https://datasheet.ciiva.com/11808/0900766b80c66297-11808450.pdf?src-supplier=Rs, ComponentLink1URL=https://datasheet.ciiva.com/11808/0900766b80c66297-11808450.pdf?src-supplier=Rs, ComponentLink2Description=https://datasheet.ciiva.com/17044/pyu-rc0402-51-rohs-l-6-17044345.pdf?src-supplier=Future+Electronics, ComponentLink2URL=https://datasheet.ciiva.com/17044/pyu-rc0402-51-rohs-l-6-17044345.pdf?src-supplier=Future+Electronics, ComponentLink3Description=https://datasheet.ciiva.com/7849/1018594-7849927.pdf?src-supplier=Element14, ComponentLink3URL=https://datasheet.ciiva.com/7849/1018594-7849927.pdf?src-supplier=Element14, ComponentLink4Description=https://datasheet.ciiva.com/7849/1018594-7849926.pdf?src-supplier=Element14, ComponentLink4URL=https://datasheet.ciiva.com/7849/1018594-7849926.pdf?src-supplier=Element14, Construction=Rectangular, Depth=0.5mm, Features="Moisture Resistant", Height=0.016inch, Lead Free="Lead Free", Length=1mm, Manufacturer Part Number=RC0402FR-0727RL, Military Standard=Not, Number of Terminations=2, Packaging="Tape and Reel", Pricing 1="1=0.1, 10=0.015, 50=0.0088, 100=0.0073, 500=0.00488, 1000=0.00417, 5000=0.00297 (USD)", Reach SVHC Compliant=Unknown, Resistance=27R, RoHS=Yes, RoHS Compliant=Yes, Series=RC, Size Code=0402, Stock 1=226903, Supplier 1=Digikey, Technology="THICK FILM", Termination=SMD/SMT, Tolerance=1%, Voltage Rating (AC)=50V, Weight=2.3E-05oz, Width=0.5mm
R9: library part RC0402FR-074K7L, "RES 4.7K OHM 1% 1/16W 0402", Case Code (Imperial)=0402, Case Code (Metric)=1005, LCSC PART NUMBER=C105871, Manufacturer=Yageo, Max Operating Temperature=155°C, Max Power Dissipation=63mW, Min Operating Temperature=-55°C, Power Rating=62.5mW, Resistance=4.7kR, Resistance Tolerance=1%, Resistor Type="Thick Film", Temperature Coefficient=100ppm/°C, Voltage Rating=50V, Case/Package=0402, Category="Chip SMD Resistors", ComponentLink1Description=https://datasheet.ciiva.com/22661/1686128-22661342.pdf?src-supplier=Element14, ComponentLink1URL=https://datasheet.ciiva.com/22661/1686128-22661342.pdf?src-supplier=Element14, ComponentLink2Description=https://datasheet.ciiva.com/7850/1018594-7850022.pdf?src-supplier=Element14, ComponentLink2URL=https://datasheet.ciiva.com/7850/1018594-7850022.pdf?src-supplier=Element14, ComponentLink3Description=https://datasheet.ciiva.com/7850/1018594-7850023.pdf?src-supplier=Element14, ComponentLink3URL=https://datasheet.ciiva.com/7850/1018594-7850023.pdf?src-supplier=Element14, ComponentLink4Description=https://datasheet.ciiva.com/15215/getdatasheetpartid-328119-15215035.pdf?src-supplier=Verical, ComponentLink4URL=https://datasheet.ciiva.com/15215/getdatasheetpartid-328119-15215035.pdf?src-supplier=Verical, Construction=Rectangular, Depth=0.5mm, Features="Moisture Resistant", Lead Free="Lead Free", Length=1mm, Manufacturer Part Number=RC0402FR-074K7L, Military Standard=Not, Number of Pins=2, Number of Terminations=2, Packaging="Tape and Reel", Pricing 1="1=0.1, 10=0.015, 50=0.0088, 100=0.0073, 500=0.00488, 1000=0.00417, 5000=0.00297 (USD)", Reach SVHC Compliant=No, RoHS=Yes, RoHS Compliant=Yes, Series=RC, Size Code=0402, Stock 1=4159184, Supplier 1=Digikey, Termination=SMD/SMT, Tolerance=1%, Voltage Rating (AC)=50V, Voltage Rating (DC)=50V, Width=0.5mm
R10 R11 R19 R21 R23: library part AC0402FR-0710KL, "RES SMD 10K OHM 1% 1/16W 0402", Case Code (Imperial)=0402, Case Code (Metric)=1005, LCSC PART NUMBER=C144807, Manufacturer=Yageo, Max Operating Temperature=155°C, Max Power Dissipation=63mW, Min Operating Temperature=-55°C, Power Rating=62.5mW, Resistance=10kR, Supplier Part Number 1=YAG3436CT-ND, Temperature Coefficient=100ppm/°C, Tolerance=1%, Voltage Rating=50V, Case/Package=0402, Category="Chip SMD Resistors", ComponentLink1Description=https://datasheet.ciiva.com/12656/pyu-ac-51-rohs-l-2-12656634.pdf?src-supplier=Mouser, ComponentLink1URL=https://datasheet.ciiva.com/12656/pyu-ac-51-rohs-l-2-12656634.pdf?src-supplier=Mouser, Features="Moisture Resistant,Automotive AEC-Q200", Height=0.015inch, Lead Free="Lead Free", Length=0.039inch, Manufacturer Part Number=AC0402FR-0710KL, Number of Terminations=2, Packaging="Tape and Reel", Pricing 1="1=0.1, 10=0.019, 50=0.0116, 100=0.0095, 500=0.00638, 1000=0.00544, 5000=0.00391 (USD)", RoHS=Yes, RoHS Compliant=Yes, Series=AC, Size Code=0402, Stock 1=1783437, Supplier 1=Digikey, Termination=SMD/SMT, Width=0.02inch
R12 R13 R14 R15: library part AC0402FR-075K1L, "RES SMD 5.1K OHM 1% 1/16W 0402", Case Code (Imperial)=0402, Case Code (Metric)=1005, LCSC PART NUMBER=C144745, Manufacturer=Yageo, Max Operating Temperature=155°C, Max Power Dissipation=63mW, Min Operating Temperature=-55°C, Resistance=5.1kR, Supplier Part Number 1=YAG3503CT-ND, Temperature Coefficient=100ppm/°C, Tolerance=1%, Voltage Rating=50V, Case/Package=0402, Category="Chip SMD Resistors", ComponentLink1Description=https://datasheet.octopart.com/AC0402FR-075K1L-Yageo-datasheet-166720450.pdf?src-supplier=Future+Electronics, ComponentLink1URL=https://datasheet.octopart.com/AC0402FR-075K1L-Yageo-datasheet-166720450.pdf?src-supplier=Future+Electronics, ComponentLink2Description=http://www.yageo.com/NewPortal/yageodocoutput?fileName=/pdf/R-Chip/PYu-AC_51_RoHS_L_6.pdf&src-supplier=Digikey, ComponentLink2URL=http://www.yageo.com/NewPortal/yageodocoutput?fileName=/pdf/R-Chip/PYu-AC_51_RoHS_L_6.pdf&src-supplier=Digikey, ComponentLink3Description=http://www.yageo.com/documents/recent/PYu-AC_51_RoHS_L_2_revised.pdf?src-supplier=Future+Electronics, ComponentLink3URL=http://www.yageo.com/documents/recent/PYu-AC_51_RoHS_L_2_revised.pdf?src-supplier=Future+Electronics, Features="Moisture Resistant,Automotive AEC-Q200", Height=0.015inch, Lead Free=5697LeadFree, Length=0.039inch, Manufacturer Part Number=AC0402FR-075K1L, Mount="Surface Mount", Number of Terminations=2, Packaging="Cut Tape", Power Rating=63mW, Pricing 1="1=0.1, 10=0.019, 50=0.0116, 100=0.0095, 500=0.00638, 1000=0.00544, 5000=0.00391 (USD)", RoHS=Yes, RoHS Compliant=Yes, Series=AC, Size Code=0402, Stock 1=81247, Supplier 1=Digikey, Width=0.02inch
sw1 sw2: library part PTS645SH50SMTR92LFS, "SWITCH TACTILE SPST-NO 0.05A 12V", Contact Current Rating=50mA, Contact Resistance=100mR, LCSC PART NUMBER=C221869, Manufacturer="ITT C&K", Category="Tactile Switches", ComponentLink1Description=https://datasheet.ciiva.com/29903/getdatasheetpartid-773702-29903807.pdf?src-supplier=Verical, ComponentLink1URL=https://datasheet.ciiva.com/29903/getdatasheetpartid-773702-29903807.pdf?src-supplier=Verical, ComponentLink2Description=https://datasheet.ciiva.com/14920/pts645-14920741.pdf?src-supplier=Digikey, ComponentLink2URL=https://datasheet.ciiva.com/14920/pts645-14920741.pdf?src-supplier=Digikey, ComponentLink3Description=https://datasheet.ciiva.com/22637/1707731-22637356.pdf?src-supplier=Element14, ComponentLink3URL=https://datasheet.ciiva.com/22637/1707731-22637356.pdf?src-supplier=Element14, Lead Free=5697LeadFree, Number of Positions=2NUMBER, RoHS=Yes, Stock 1=43982, Supplier 1=Digikey
U1: library part ESP32-S3-MINI-1-N8, "SMD module, ESP32-S3FN8, 8 MB SPI flash, PCB antenna", LCSC PART NUMBER=C2913206, Manufacturer="Espressif Systems", Category=LDO, ComponentLink1Description=https://datasheet.octopart.com/ESP32-S3-MINI-1-N8-Espressif-Systems-datasheet-165560562.pdf?src-supplier=TME, ComponentLink1URL=https://datasheet.octopart.com/ESP32-S3-MINI-1-N8-Espressif-Systems-datasheet-165560562.pdf?src-supplier=TME, RoHS=No, Stock 1=15486, Supplier 1=Digikey
U2: "USB Bridge, USB to UART USB 2.0 UART Interface 20-QFN (4x4)", LCSC PART NUMBER=C132159, Manufacturer=FTDI, Category="Interface ICs", ComponentLink1Description=https://datasheet.ciiva.com/4787/ds-ft231x-13571-4787570.pdf?src-supplier=Mouser, ComponentLink1URL=https://datasheet.ciiva.com/4787/ds-ft231x-13571-4787570.pdf?src-supplier=Mouser, ComponentLink2Description=https://datasheet.ciiva.com/30475/0900766b811020d3-30475405.pdf?src-supplier=Rs, ComponentLink2URL=https://datasheet.ciiva.com/30475/0900766b811020d3-30475405.pdf?src-supplier=Rs, ComponentLink3Description=https://datasheet.ciiva.com/1787/ds-ft231x-1787312.pdf?src-supplier=Digikey, ComponentLink3URL=https://datasheet.ciiva.com/1787/ds-ft231x-1787312.pdf?src-supplier=Digikey, ComponentLink4Description=https://datasheet.ciiva.com/1787/ft-x-series-1787313.pdf?src-supplier=Digikey, ComponentLink4URL=https://datasheet.ciiva.com/1787/ft-x-series-1787313.pdf?src-supplier=Digikey, ComponentLink5Description=https://datasheet.ciiva.com/1787/ft-x-series-1787314.pdf?src-supplier=Digikey, ComponentLink5URL=https://datasheet.ciiva.com/1787/ft-x-series-1787314.pdf?src-supplier=Digikey, Height=800um, Lead Free=5697LeadFree, Manufacturer Part Number=FT231XQ-R, Pricing 1="1=2.34, 25=2.27, 100=2.2, 250=2, 500=1.82002, 1000=1.7625 (USD)", RoHS=Yes, Stock 1=64324, Supplier 1=Digikey
U3: "IC REG LINEAR 3.3V 1.5A SOT223-4", LCSC PART NUMBER=C181262, Manufacturer="Texas Instruments", Category="Voltage Regulators - Linear", ComponentLink1Description=https://datasheet.ciiva.com/2046/-2046068.pdf?src-supplier=Digikey, ComponentLink1URL=https://datasheet.ciiva.com/2046/-2046068.pdf?src-supplier=Digikey, Lead Free=5697LeadFree, Manufacturer Part Number=TL1963A-33DCYR, Pricing 1="1=2.87, 10=2.578, 25=2.4368, 100=2.112, 250=2.00368, 500=1.79788, 1000=1.51629 (USD)", RoHS=Yes, Stock 1=2551, Supplier 1=Digikey, Thickness=1.6mm

## Free pads (board coordinates)
  rect 64x64 hole 40: 1(2659,86)
  round 64 hole 40: 2(2559,86) 3(2459,86) 4(2359,86) 5(2259,86) 6(2159,86) 7(2059,86) 8(1959,86) 9(1859,86) 10(1759,86) 11(1659,86) 12(1559,86) 13(1459,86) 14(1359,86) 15(1259,86) 16(1159,86) 17(1059,86) 18(959,86) 19(859,86) 20(759,86) 21(659,86) 22(559,86) 23(459,86) 24(359,86)

## Via types
v1: diameter 24, hole 12, L1 to L4, tented both sides, 169 vias
v2: diameter 24/24/24 (per signal layer), hole 12, L1 to L4, tented both sides, 1 vias

## Nets (pads, with @x,y where several pads share a name; then routed paths per layer and width w, separated by ;. In a path a pad name is that pad's centre, name@x,y a point inside that pad or via, vN(x,y) a via of type N, cw(c..) or ccw(c..) an arc to the next point about the centre after c; other vN are vias at no path point)
+3V3: C3.2 C4.2 C14.2 C15.2 J1.2 J5.2 pad.1 R2.1 R3.2 R4.1 R5.2 R19.2 U1.3 | length 5028.9
  L1 w6: R2.1@748.02,556 782,589.98 944.2,589.98 963.22,609 v1(1446,609) 1429.75,592.75 1429.75,566.86 J5.2@1429.74,542.01 ; J5.2@1420,542 J5.2@1424,546 ; v1(2036,841) 2068,873 v1(2452,873) 2456,873 2460,877 2465,882 2465,907 ; C14.2@2411.93,907 2465,907 ; C15.2@2507.07,891 2504,891 C15.2@2504,896 ; C3.2@2604.14,891 2604,891.14 2604,971 J1.2@2569,1006 2561.68,998.68 2561.68,938.68 v1(2559,936) 2544,936 C15.2@2504,896 ; C4.2@2650.93,191 2669,191 v1(2669,151) ; 2465,907 v1(2489,931) 2489,927.21 2501.83,914.38 2501.83,897.76 2503.59,896 C15.2@2504,896
  L1 w15: R4.1@891.01,906 894.14,902.87 894.14,901.69 923.1,872.72 932.28,872.72 v1(934,871) ; J5.2@1420,542 J5.2@1429.75,542 ; v1(1526,582) 1527.44,583.44 1579.16,583.44 1759.59,403.01 ; R19.2@1664,403.01 1759.59,403.01 ; R3.2@1824,818.99 1825,820 1878,820 ; v1(1826,643) 1826,768 1878,820 ; R5.2@1839,278.01 1840.49,279.5 1840.49,322.11 1759.59,403.01 ; v1(1875.75,845.75) v1@1877.5,847.5 ; v1(1956,862) 1956,850.29 1953.21,847.5 v1@1877.5,847.5 ; v1(2550,748) 2559.5,757.5 2559.5,778.22 2560.73,779.45 U1.3@2560.73,808.13 ; v1@1877.5,847.5 1878,847 1878,820
  L4 w6: v1(934,871) 889,826 889,736 905.28,736 957.78,683.5 1131.88,683.5 1206.38,609 v1(1446,609) ; v1@1448.44,607.28 1450.16,607.28 1455.19,602.25 1505.75,602.25 v1(1526,582) 1567.55,582 1606.55,621 1685,621 1707,643 v1(1826,643) ; v1@1959.72,863.28 1992.16,863.28 2014.44,841 v1(2036,841) ; v1(2489,931) 2519.5,900.5 2519.5,778.5 2599.53,698.47 2599.53,587.25 2665.5,521.28 2665.5,293.78 2626.5,254.78 2626.5,193.5 v1(2669,151) 2669,148.56 2659,138.56 pad.1@2659,86
+3V3_FTDI: C6.2 R4.2 R8.1 U2.10 U2.20 | length 879.4
  L1 w6: 609.63,746.63 626.59,763.59 U2.10@626.59,776.4
  L1 w15: R8.1@569,618.99 522.79,618.99 514,627.78 v1(514,651) 609.63,746.63 ; U2.20@794.24,854.41 cw(c809.63,838) 809.63,860.5 836.32,860.5 845.82,851 C6.2@855.14,851 ; v1(819,886) 819,888.56 832.12,901.69 853.86,901.69 R4.2@856.99,904.82 ; C6.2@852.01,855.31 855.14,852.18 C6.2@855.14,851 ; R4.2@856.99,906 R4.2@856.99,904.82 ; C6.2@855.14,851 857.03,852.89 857.03,901.69 856.99,901.73 R4.2@856.99,904.82
  L4 w6: v1(514,651) 666,651 819,804 v1(819,886)
+3V3_REG: C12.2 C13.2 J5.1 U3.3 | length 1457.5
  L1 w15: C12.2@519,216.71 520.18,216.71 526.89,210 571.4,210 572.34,210.94 580.87,210.94 C13.2@584,214.07 587.07,211 C13.2@587.22,211 ; v1(544,171) v1(589,171) ; U3.3@675.97,240.45 669,233.48 669,219.79 660.21,211 C13.2@587.22,211 ; J5.1@1374,546 1374,582.5 1370,586.5 1102.01,586.5 1082.99,567.48 815,567.48 749,501.48 749,171 v1(589,171) ; C13.2@587.22,211 587.28,210.94 587.28,172.72 v1(589,171)
+5V: C9.2 C11.2 J1.22 J6.2 R1.1 U3.1 | length 1211
  L1 w15: J6.2@374,546 378.78,541.22 395.07,541.22 395.29,541 502.64,541 509.72,533.93 548,533.93 C11.2@561.69,520.24 ; C9.2@540.93,911 540.93,964.67 569,992.74 J1.22@569,1006 ; C11.2@561.69,519.06 564.82,515.93 C11.2@566,515.93 569.13,512.8 579.16,512.8 599.09,492.87 599.09,441.48 619.02,421.55 U3.1@675.97,421.55 679.98,425.57 R1.1@679.98,556
  L4 w6: J6.2@374,546 430,546 479.5,595.5 479.5,718.22 486,724.72 486,774.11 503.5,791.61 503.5,839.5 583,919 583,948.74 578.38,953.36 578.38,996.62 J1.22@569,1006
+5V_VBUS1: C5.2 D3.2 J3.A4B9 J3.B4A9 J6.1 R9.2 | length 1396.5
  L1 w6: 235.88,708.32 254.39,708.32 J3.B4A9@261.2,701.51 268.02,694.7 310.05,694.7 314.75,690 316,690 359,647 359,611 J6.1@374,596 ; J3.A4B9@254.39,883.68 J3.A4B9@261.2,890.49
  L1 w10: 235.88,708.32 215.34,728.87 215.34,870.14 228.87,883.68 J3.A4B9@254.39,883.68
  L1 w15: J3.A4B9@261.2,890.49 304.1,890.49 317.82,904.2 D3.2@348,904.2 ; J6.1@374,596 416.28,596 431.78,580.5 456.22,580.5 473.5,597.78 473.5,605.5 ; C5.2@451,659 454.13,655.87 454.13,654.69 473.5,635.32 473.5,605.5 ; v1(605.93,558.93) 520.07,558.93 473.5,605.5 ; R9.2@908.02,706 937,706 v1(989,654)
  L4 w6: v1(605.93,558.93) 606.57,559.57 917.32,559.57 987.28,629.53 987.28,652.28 v1(989,654)
+5V_VBUS2: C10.2 D6.2 J4.A4B9 J4.B4A9 J6.3 | length 673
  L1 w15: D6.2@356,198.8 352.3,198.8 349.58,201.51 J4.B4A9@261.2,201.51 256.89,205.82 232.47,205.82 229.77,208.52 225.63,208.52 204,230.14 204,355.33 234.85,386.18 256.89,386.18 J4.A4B9@261.2,390.49 308.65,390.49 362.16,444 417.28,444 432.07,458.79 432.07,480 ; J6.3@374,496 380.76,496 396.76,480 432.07,480 ; C10.2@458.07,480 432.07,480
+VCC_FTDI: C1.2 C2.2 R1.2 R2.2 U2.12 | length 195.4
  L1 w6: U2.12@689,725.75 U2.12@689,737.82 ; U2.12@689,728.52 689,699.07 705.65,682.42 706.49,682.42 712.07,676.84 C2.2@712.07,676
  L1 w15: C2.2@712.07,676 C1.2@712.07,616 712.07,590.31 714,588.38 R2.2@714,556
BTN_GPIO0: C17.2 Q2.3 R20.1 sw2.1 sw2.2 | length 1171.6
  L1 w6: Q2.3@1143.85,843.4 1231.6,843.4 1239,836 1239,710.92 sw2.2@1242.5,707.42 1290.42,707.42 1309,726 1536.91,726 sw2.1@1555.5,707.42 1560.42,707.42 1595.93,742.93 1660.52,742.93 1668.75,734.7 1673.72,734.7 1792.42,616 1849.44,616 1905,671.56 1905,772.18 1920.82,788 1949.98,788 R20.1@1949.98,811
"CHIP PU": C16.2 pad.3 Q1.3 R19.1 sw1.1 sw1.2 U1.45 | length 3188
  L1 w6: Q1.3@1146.42,676 1196.61,676 1210.61,662 1481.14,662 1487,656.14 1487,451.91 1268.02,232.93 1268.02,228.01 sw1.2@1247.43,207.42 ; sw1.2@1242.5,207.42 sw1.2@1247.43,207.42 ; v1(1611,456) 1611,374.86 1616.86,369 R19.1@1664,368.99 ; R19.1@1665.18,368.99 R19.1@1664,368.99 ; pad.3@2459,86 2465.72,86 2579,199.28 2597.53,217.81 2624,217.81 2627.66,221.47 U1.45@2627.66,256.94 ; sw1.2@1247.43,207.42 sw1.1@1555.5,207.42 1560.42,207.42 1615.14,262.14 1615.14,278.64 1652.27,315.76 1658.76,315.76 C16.2@1664,321 R19.1@1664,368.99
  L4 w6: v1@1610,457 1995.18,457 2014.18,438 2187,438 2226,399 2580.13,399 2585.99,393.14 2585.99,204.7 2467.28,86 pad.3@2459,86
CON1_USB_N: D4.2 J3.A7 J3.B7 R6.1 | length 471.5